# EAGLE board fm_1 (EAGLE 9.2.1)
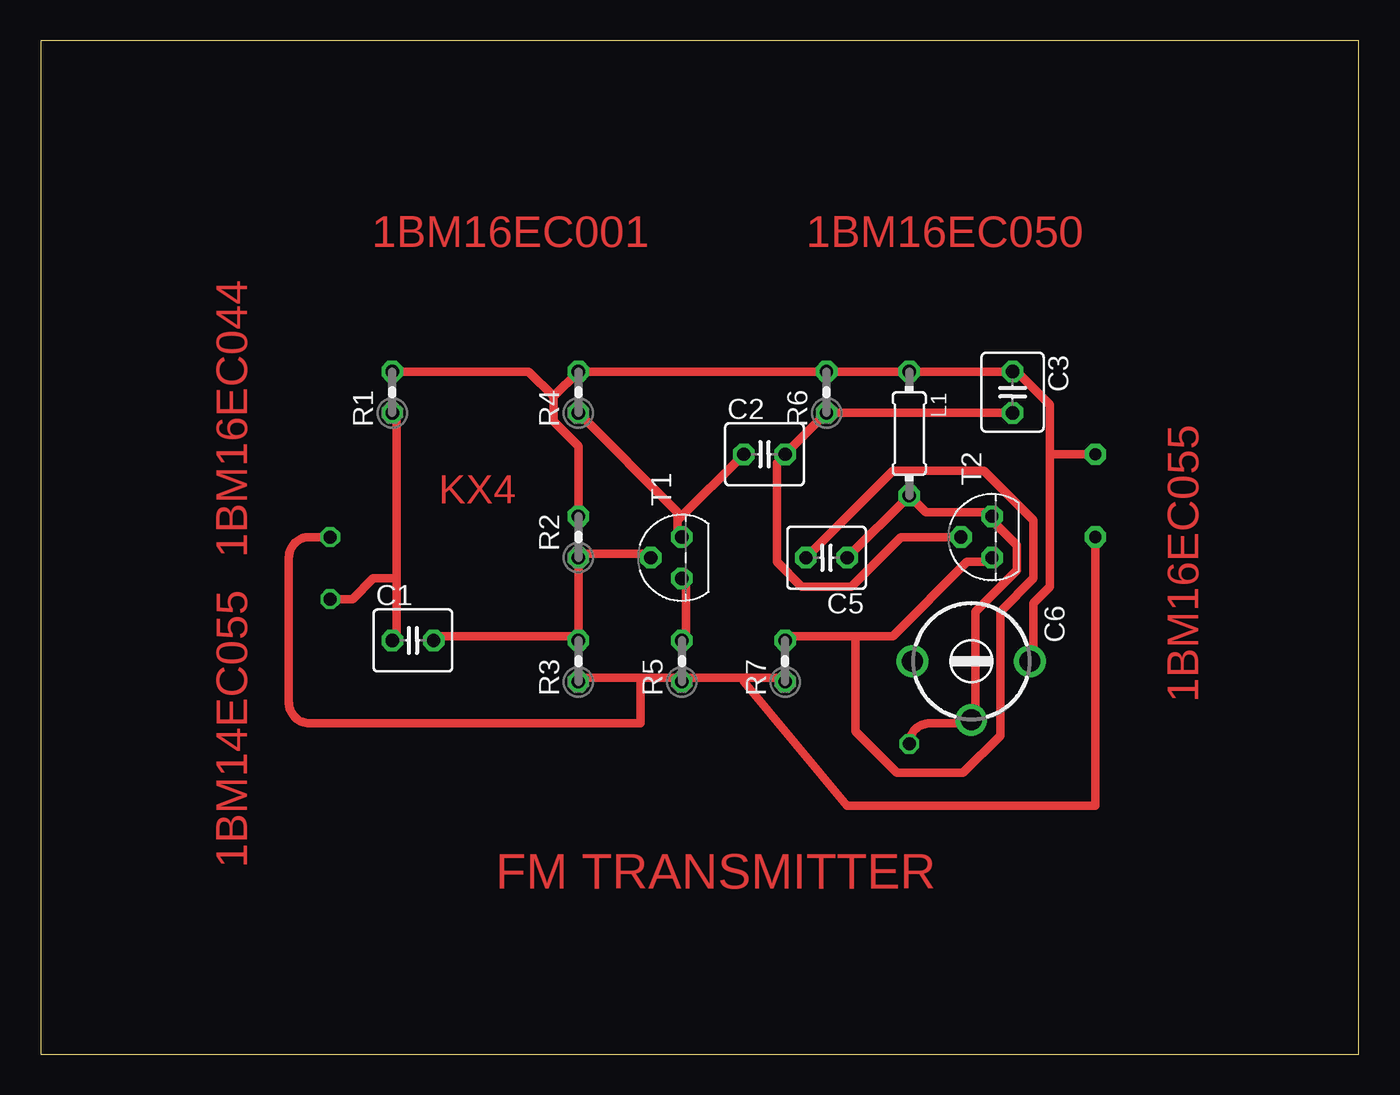
[diagram p0: board, top side]

Size 80.95 x 62.22 mm. Coordinates in mm from the lower left corner, seen from the top.
Outline: 0,0 80.95,0 80.95,62.22 0,62.22 0,0
Copper layers (1*16): Top 0.035mm / dielectric 1.5mm / Bottom 0.035mm
Design rules "default": minimum track width 6mil, minimum drill 0.35mm, track to track 6mil, track to pad 6mil, pad to pad 6mil, via to via 6mil, smd to smd 6mil, copper to edge 40mil, drill to drill 6mil, minimum pad ring 10mil, minimum via ring 8mil, stop-mask expansion 4mil, vias tented up to drill 0mil, thermal gap 10mil
Net classes: 0 default: width 0.508 mm, drill 0.305 mm, clearance 0.508 mm

## Footprints (pad centres in the part's own frame; a part is rotated, then mirrored left to right if it is on the bottom)
C025-040X050 = drill 0.813 octagon: 1 -1.27,0; 2 1.27,0
CTRIM808-BC = drill 1.3: 1 -3.607,0; 2 0,3.607; 3 3.607,0
0204/7 = drill 0.813 octagon: 1 -3.81,0; 2 3.81,0
0204V = drill 0.813 octagon: 1 -1.27,0; 2 1.27,0
TO92 = drill 0.813 octagon: 1 1.27,0; 2 0,1.905; 3 -1.27,0

## Placement (x,y rotation side)
C1  0.1uF  [C025-040X050]  22.86,25.4 0 top
C2  0.1uF  [C025-040X050]  44.45,36.83 0 top
C3  0.01uF  [C025-040X050]  59.69,40.64 270 top
C5  4.7pF  [C025-040X050]  48.26,30.48 180 top
C6  [CTRIM808-BC]  57.15,24.13 180 top
L1  0.1uH  [0204/7]  53.34,38.1 270 top
R1  10K  [0204V]  21.59,40.64 90 top
R2  1M  [0204V]  33.02,31.75 90 top
R3  100K  [0204V]  33.02,24.13 90 top
R4  10K  [0204V]  33.02,40.64 90 top
R5  100  [0204V]  39.37,24.13 90 top
R6  10K  [0204V]  48.26,40.64 90 top
R7  1K  [0204V]  45.72,24.13 90 top
T1  2N3904  [TO92]  39.37,30.48 90 top
T2  2N3904  [TO92]  58.42,31.75 90 top

## Library data of the parts
C1-C3 C5 C6 = rcl; SPICEPREFIX: C
L1 = eagle-ltspice; SPICEMODEL: NONE; SPICEPREFIX: L
R1-R7 = rcl; SPICEPREFIX: R
T1 T2 = transistor

## Nets
N$1: C3.1 C6.1 L1.1 R1.2 R2.2 R4.2 R6.2
N$2: C1.1 R1.1
N$3: C1.2 R2.1 R3.2 T1.2
N$4: R3.1 R5.1 R7.1
N$5: C2.1 R4.1 T1.1
N$6: C2.2 C3.2 R6.1 T2.2
N$7: C5.1 C6.2 L1.2 T2.1
N$8: C5.2 R7.2 T2.3
N$9: R5.2 T1.3

## Tracks (layer width: path | path; a pad name or v marks a point on that pad's centre or on a via)
N$1
  Top 0.508: R2.2 33.02,37.34 31.5,38.86 31.5,40.39 | 31.5,40.39 R4.2 R6.2 L1.1 C3.1 59.94,41.91 61.98,39.88 61.98,28.7 60.96,27.69 60.96,24.13 C6.1 | R1.2 29.97,41.91 31.5,40.39
N$2
  Top 0.508: 21.84,29.21 21.84,39.37 R1.1 | 21.84,29.21 21.84,25.65 C1.1 | 21.84,29.21 20.41,29.21 19.14,27.94 17.78,27.94
N$3
  Top 0.508: T1.2 37.08,30.73 33.02,30.73 R2.1 33.02,25.65 | 33.02,25.65 24.38,25.65 C1.2 | 33.02,25.65 R3.2
N$4
  Top 0.508: R3.1 33.02,23.11 39.12,23.11 R5.1 39.62,23.11 45.72,23.11 R7.1
N$5
  Top 0.508: R4.1 39.12,33.27 39.12,32.77 | 39.12,32.77 39.12,31.75 T1.1 | 39.12,32.77 C2.1
N$6
  Top 0.508: T2.2 52.83,31.75 49.78,28.7 46.74,28.7 45.21,30.23 45.21,36.32 C2.2 R6.1 C3.2
N$7
  Top 0.508: C5.1 L1.2 54.36,33.27 58.42,33.27 T2.1 58.42,32.77 59.94,31.24 59.94,29.72 57.4,27.18 57.4,20.57 C6.2
N$8
  Top 0.508: 50.04,25.65 52.32,25.65 56.9,30.23 58.42,30.23 T2.3 | 50.04,25.65 45.72,25.65 R7.2 | C5.2 52.32,35.81 57.91,35.81 60.96,32.77 60.96,29.21 58.93,27.18 58.93,19.56 56.64,17.27 52.58,17.27 50.04,19.81 50.04,25.65
N$9
  Top 0.508: R5.2 39.62,25.65 39.62,29.21 T1.3
N$10  (via drill 0.8 pad 0.95)
  Top 0.508: v53.34,19.05 arc-90 54.61,20.32 57.15,20.32
N$11  (via drill 0.8 pad 0.95)
  Top 0.508: v17.78,31.75 16.51,31.75 arc90 15.24,30.48 15.24,21.59 arc90 16.51,20.32 36.83,20.32 36.83,22.86
N$12  (via drill 0.8 pad 0.95)
  other vias: 17.78,27.94
N$13  (via drill 0.75 pad 1.3)
  Top 0.508: v64.77,36.83 62.23,36.83
N$14  (via drill 0.75 pad 1.3)
  Top 0.508: v64.77,31.75 64.77,15.24 49.53,15.24 43.18,22.86

## Text on the board
Top: 1BM16EC001 | 1BM16EC050 | KX4 | 1BM16EC044 | 1BM16EC055 | 1BM14EC055 | FM TRANSMITTER